# Altium PCB PCB1.PcbDoc
Units mm, origin at the board's own origin, x right, y up, seen from the top; angles counter-clockwise.
Board outline 64.13 x 24.77 mm, 2 copper layers (Top Layer, Bottom Layer); 46 components, 34 nets, 209 pads, 71 vias.
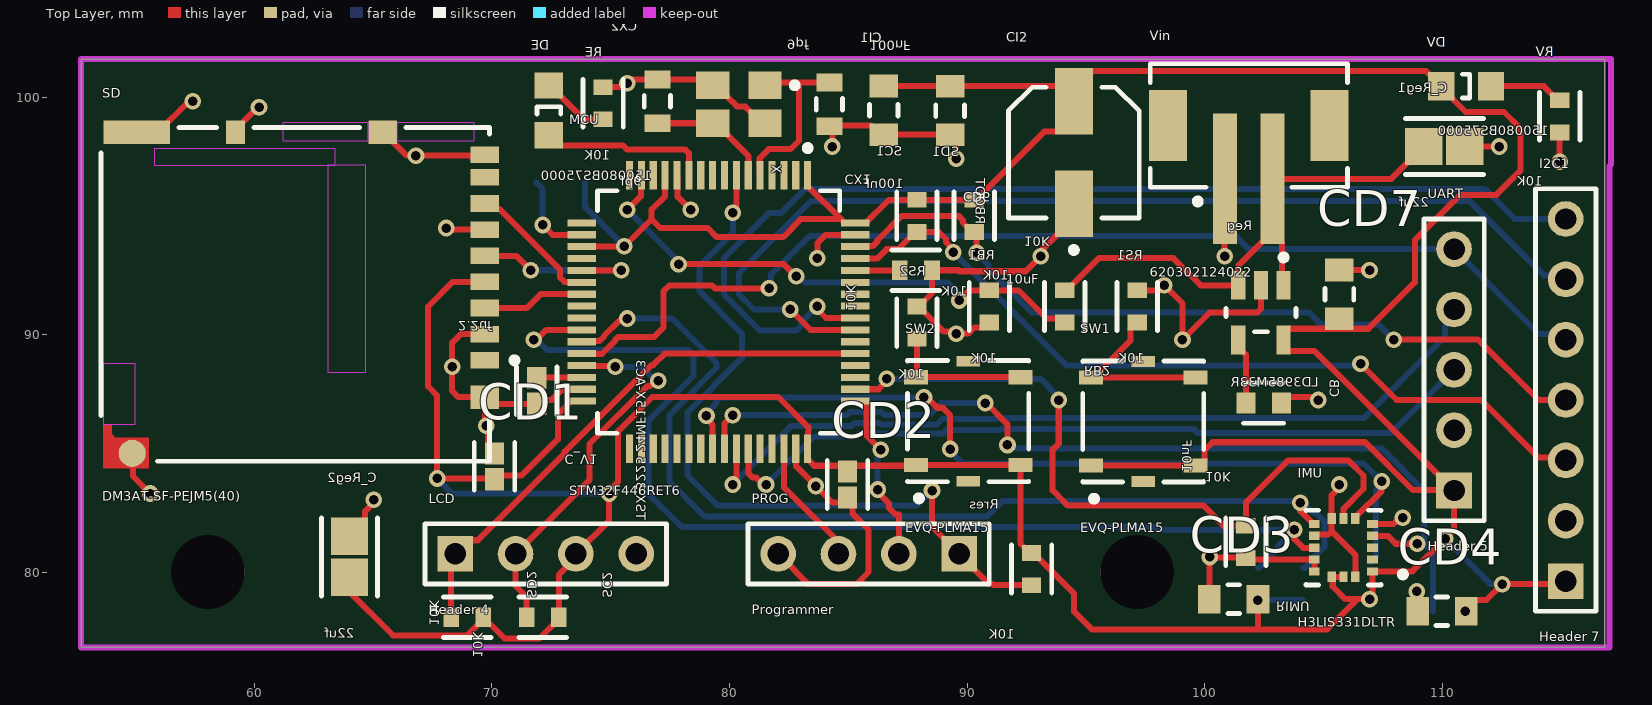
[diagram p0: Top Layer view]
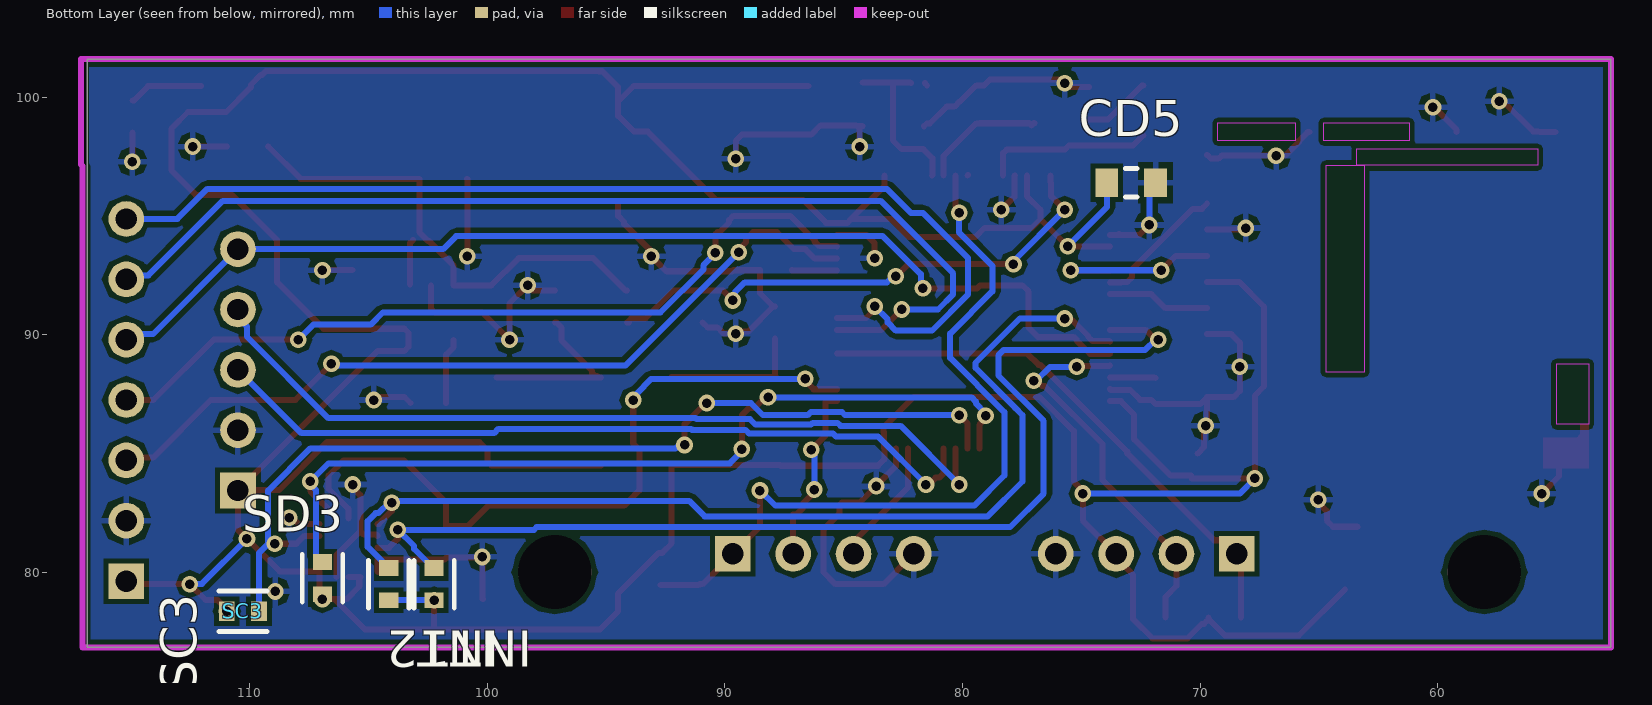
[diagram p1: Bottom Layer view, seen from below]
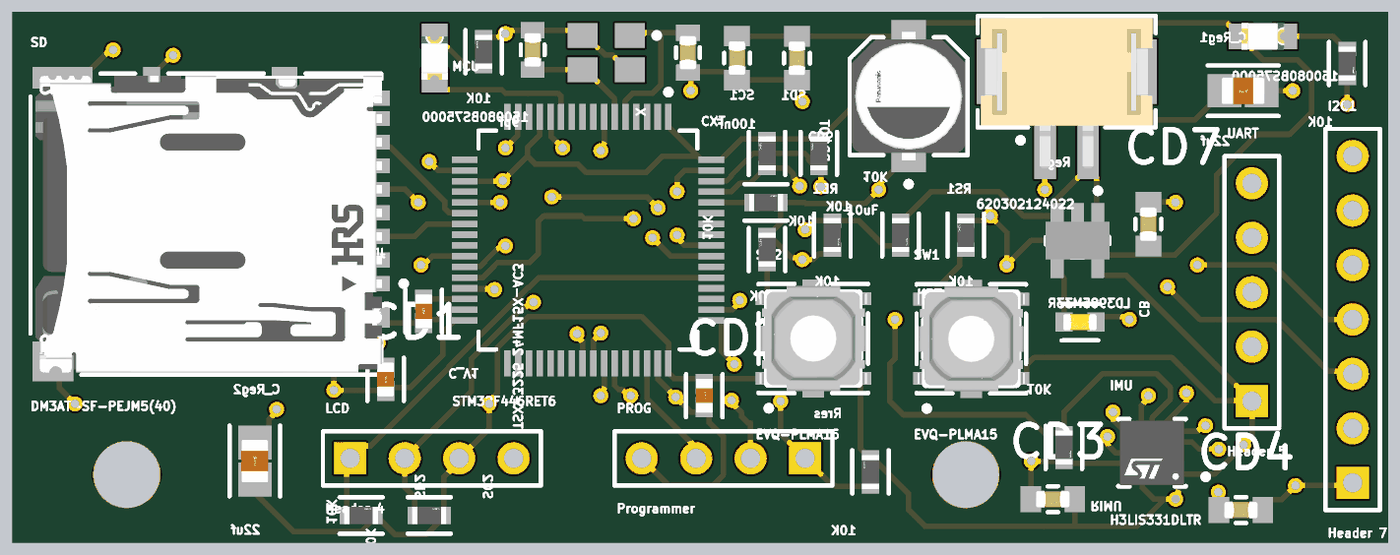
[diagram p2: 3D render of the assembled board from above, using the file's embedded part models]
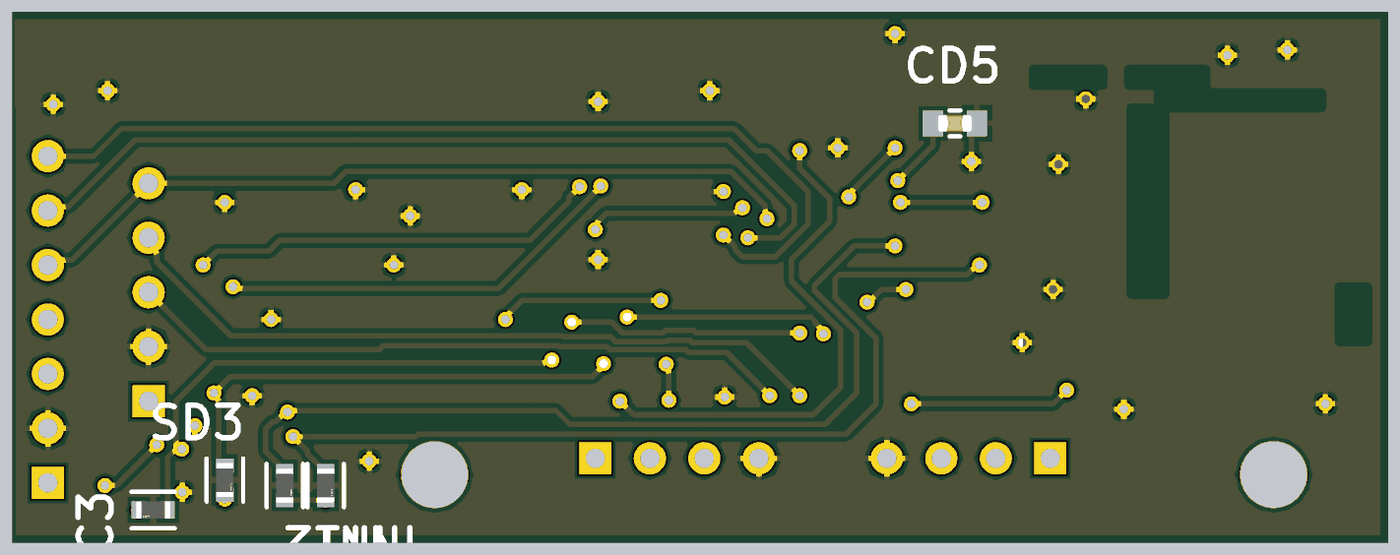
[diagram p3: 3D render of the assembled board from below, using the file's embedded part models]

## Layer stack, top to bottom
Top Solder: solder mask 0.0102, Solder Resist, Dk 3.5
Top Layer: signal copper 0.0356
Dielectric 1: dielectric 0.32, FR-4, Dk 4.8
Bottom Layer: signal copper 0.0356
Bottom Solder: solder mask 0.0102, Solder Resist, Dk 3.5

## Board outline
52.705,76.835 52.705,101.6 116.84,101.6 116.84,76.835

## Design rules (kind name [scope] priority, off if disabled: settings)
Clearance [All] p1: gap=0.2 ignorepadtopadclearanceinfootprint=FALSE except(0.127: Arc-Arc Arc-Track Track-Track SMDPad-SMDPad)
PolygonConnect [All] p1: connectstyle=Relief reliefconductorwidth=0.254 reliefentries=4 polygonreliefangle="90 Angle" airgapwidth=0.254
RoutingVias [All] p1: holewidth=0.711 width=1.27 viastyle="Through Hole" minholewidth=0.711 minwidth=1.27 maxholewidth=0.711 maxwidth=1.27
SolderMaskExpansion [All] p1: expansion=0.102 istentingtop=FALSE
Width [All] p1: maxlimit=0.5 minlimit=0.254 preferedwidth=0.254
30 further rules are at their usual default settings.

## Components (designator, comment, footprint, x,y, rotation, side; value= is the part's Value field where it differs from the comment)
C_Reg1 "22uf" FP-C2012-125-0_2-IPC_A 110.084,97.917 r180 top
C_Reg2 "22uf" FP-C2012-125-0_2-IPC_A 64.008,80.645 r270 top
C_V1 "2.2uf" FP-C1608-080-0_1-IPC_C 71.882,87.63 r270 top
CB "10nF" FP-CC0603-DA-MFG 102.477,87.122 r0 top value="10 nF"
CD1 "4.7uf" FP-C1608-080-0_1-IPC_C 70.104,84.455 r90 top
CD2 "4.7uf" FP-C1608-080-0_1-IPC_C 84.963,83.693 r270 top
CD3 "100nF" FP-CGA3E-0_3-0_1-IPC_A 101.21,78.867 r180 top
CD4 "100nF" FP-CGA3E-0_3-0_1-IPC_A 109.982,78.359 r180 top
CD5 "100nF" FP-CGA3E-0_3-0_1-IPC_A 72.898,96.393 r180 bottom
CD6 "100nF" FP-CGA3E-0_3-0_1-IPC_A 89.281,99.432 r270 top
CD7 "100nF" FP-CGA3E-0_3-0_1-IPC_A 105.664,91.694 r90 top
CI1 "100nF" FP-CGA3E-0_3-0_1-IPC_A 86.487,99.441 r90 top
CI2 "10uF" FP-SC-MFG 94.488,97.663 r90 top
CX1 "9pf" FP-CGA3E-0_3-0_1-IPC_B 84.201,99.695 r270 top
CX2 "9pf" FP-CGA3E-0_3-0_1-IPC_B 76.962,99.822 r90 top
DE "150080BS75000" 0805_A 72.39,99.441 r270 top
DV "150080BS75000" 0805_A 110.998,100.457 r180 top
I2C1 "Header 7" HDR1X7 115.189,79.629 r90 top
IMU "H3LIS331DLTR" FP-TFLGA16-7983231-MFG 105.836,81.034 r180 top
INT1 "10K" FP-RC0603-0_55-IPC_C 102.235,79.502 r270 bottom
INT2 "10K" FP-RC0603-0_55-IPC_C 104.14,79.502 r270 bottom
LCD "Header 4" HDR1X4 68.453,80.772 r0 top
MCU "STM32F446RET6" FP-LQFP64-5W-MFG 79.537,90.952 r270 top
PROG "Programmer" HDR1X4 89.662,80.772 r180 top
RB1 "10K" FP-RC0603-0_55-IPC_C 90.932,91.186 r270 top
RB2 "10K" FP-RC0603-0_55-IPC_C 94.107,91.186 r270 top
RBOOT "10K" FP-RC0603-0_55-IPC_C 87.842,92.71 r0 top
RE "10K" FP-RC0603-0_55-IPC_C 74.676,99.737 r90 top
Reg "LD3985M33R" FP-SOT23-5L-7049676-MFG 102.362,90.925 r270 top
RIMU "10K" FP-RC0603-0_55-IPC_C 101.727,81.28 r270 top
Rres "10K" FP-RC0603-0_55-IPC_C 92.71,80.137 r90 top
RS1 "10K" FP-RC0603-0_55-IPC_C 97.155,91.186 r90 top
RS2 "10K" FP-RC0603-0_55-IPC_C 87.884,90.509 r90 top
RV "10K" FP-RC0603-0_55-IPC_C 114.935,99.187 r270 top
SC1 "10K" FP-RC0603-0_55-IPC_C 87.884,94.996 r90 top
SC2 "10K" FP-RC0603-0_55-IPC_C 72.136,78.105 r0 top
SC3 "10K" FP-RC0603-0_55-IPC_C 110.278,78.359 r0 bottom
SD "DM3AT-SF-PEJM5(40)" FP-DM3AT-SF-PEJM5_40-MFG 61.722,91.694 r270 top
SD1 "10K" FP-RC0603-0_55-IPC_C 90.297,94.996 r90 top
SD2 "10K" FP-RC0603-0_55-IPC_C 68.961,78.105 r0 top
SD3 "10K" FP-RC0603-0_55-IPC_C 106.934,79.756 r270 bottom
SW1 "EVQ-PLMA15" FP-EVQ-PLMA15-MFG 97.409,86.345 r90 top
SW2 "EVQ-PLMA15" FP-EVQ-PLMA15-MFG 90.043,86.36 r90 top
UART "Header 5" HDR1X5 110.49,83.439 r90 top
Vin "620302124022" 620302124022 101.854,98.806 r180 top
X "TSX-3225 24MF15X-AC3" EPSON-TSX-3225_V 80.391,99.695 r180 top

## Footprints (in the part's own frame and the unit in brackets; to place one, negate y for a bottom-side part, rotate by r counter-clockwise, add the part's x,y. Pads: shape width x height; smd on the part's side, far side on the other; paste and mask are expansions set on the pad)
0805_A [mm] "Chip LED, 2-Leads, Body 2.0x1.3mm, IPC Medium Density"
  rect 1.1x1.2 smd: 1(-1.05,0) 2(1.05,0)
  silkscreen extent -0.15,-0.5 0.15,0.5, body extent -1,-0.63 1,0.63, height 0.68
620302124022 [mm] "2.00mm SMT Male Vertical Shrouded Header, 2p"
  rect 1x5.5 smd: 1(1,2.25) 2(-1,2.25)
  rect 1.6x3 smd: MP1(-3.4,0) MP2(3.4,0)
  silkscreen extent -4.15,-2.6 4.15,3.32, body extent -4,-2.5 4,4.51, height 6.77
EPSON-TSX-3225_V [mm] "SMD, 4-Leads, Body 3.2x2.5mm"
  rect 1.4x1.15 smd: 1(-1.1,-0.8) 2(1.1,-0.8) 3(1.1,0.8) 4(-1.1,0.8)
  silkscreen extent -2.48,-0.92 -2.23,-0.68, body extent -1.6,-1.25 1.6,1.25, height 0.6
FP-C1608-080-0_1-IPC_C [mm]
  rect 0.931x0.812 smd paste+0 mask+0: 1(-0.541,0) 2(0.541,0)
  silkscreen extent -1.01,-0.85 1.01,0.85, body extent -0.8,-0.4 0.8,0.4, height 0.9
FP-C2012-125-0_2-IPC_A [mm]
  rect 1.578x1.556 smd paste+0 mask+0: 1(-0.864,0) 2(0.864,0)
  silkscreen extent -1.65,-1.18 1.65,1.18, body extent -1,-0.63 1,0.63, height 1.45
FP-CC0603-DA-MFG [mm]
  rect 0.8x0.9 smd paste+0 mask+0: 1(-0.75,0) 2(0.75,0)
  silkscreen extent -0.85,-0.85 0.85,0.85, body extent -0.8,-0.4 0.8,0.4, height 0.9
FP-CGA3E-0_3-0_1-IPC_A [mm]
  rect 0.956x1.206 smd paste+0 mask+0: 1(-1.025,0) 2(1.025,0)
  silkscreen extent -0.25,-0.6 0.25,0.6, body extent -2,-1.1 2,1.1, height 0.25
FP-CGA3E-0_3-0_1-IPC_B [mm]
  rect 0.756x1.106 smd paste+0 mask+0: 1(-0.925,0) 2(0.925,0)
  silkscreen extent -0.25,-0.55 0.25,0.55, body extent -0.8,-0.4 0.8,0.4, height 1.1
FP-DM3AT-SF-PEJM5_40-MFG [mm]
  rect 0.7x1.2 smd paste+0 mask+0: 1(2.775,7.975) 2(1.675,7.975) 3(0.575,7.975) 4(-0.525,7.975) 5(-1.625,7.975) 6(-2.725,7.975) 7(-3.825,7.975) 8(-4.925,7.975) 9(-5.875,7.975)
  rect 1x0.8 smd paste+0 mask+0: 10(-6.825,-2.525)
  rect 1x1.2 smd paste+0 mask+0: 11(4.325,7.975) 12(-6.825,3.675)
  rect 1x2.8 smd paste+0 mask+0: 13(-6.825,-6.675)
  round 1.145 smd paste+0 mask+0: 14(6.689,-6.861)
  Top Layer region: 6.025,-6.175 7.325,-6.175 7.325,-8.075 5.475,-8.075 5.475,-7.725 5.875,-7.725 6.025,-7.575 6.025,-6.175
  Keep-Out Layer region: -7.225,4.275 -6.475,4.275 -6.475,7.525 -7.225,7.525
  Keep-Out Layer region: -7.225,-0.525 -6.475,-0.525 -6.475,3.075 -7.225,3.075
  Keep-Out Layer region: -6.125,-5.925 -5.425,-5.925 -5.425,1.675 -6.125,1.675
  Keep-Out Layer region: -5.425,1.375 3.275,1.375 3.275,2.975 -5.425,2.975
  Keep-Out Layer region: 2.925,-8.075 5.475,-8.075 5.475,-6.725 2.925,-6.725
  silkscreen extent -7.02,-8.17 7.02,9.35, body extent -6.93,-7.95 6.92,8.2, height 1.68
FP-EVQ-PLMA15-MFG [mm]
  rect 0.45x1 smd paste+0 mask+0: 1(-2.525,0) 2(2.525,0)
  rect 0.6x1 smd paste+0 mask+0: A(-1.85,2.2) A'(-1.85,-2.2) B(1.85,2.2) B'(1.85,-2.2)
  silkscreen extent -3.37,-2.55 2.55,2.55, body extent -2.85,-2.8 2.85,2.8, height 0.25
FP-LQFP64-5W-MFG [mm]
  rect 1.2x0.3 smd paste+0 mask+0: 1(-5.75,3.75) 2(-5.75,3.25) 3(-5.75,2.75) 4(-5.75,2.25) 5(-5.75,1.75) 6(-5.75,1.25) 7(-5.75,0.75) 8(-5.75,0.25) 9(-5.75,-0.25) 10(-5.75,-0.75) 11(-5.75,-1.25) 12(-5.75,-1.75) 13(-5.75,-2.25) 14(-5.75,-2.75) 15(-5.75,-3.25) 16(-5.75,-3.75) 33(5.75,-3.75) 34(5.75,-3.25) 35(5.75,-2.75) 36(5.75,-2.25) 37(5.75,-1.75) 38(5.75,-1.25) 39(5.75,-0.75) 40(5.75,-0.25) 41(5.75,0.25) 42(5.75,0.75) 43(5.75,1.25) 44(5.75,1.75) 45(5.75,2.25) 46(5.75,2.75) 47(5.75,3.25) 48(5.75,3.75)
  rect 0.3x1.2 smd paste+0 mask+0: 17(-3.75,-5.75) 18(-3.25,-5.75) 19(-2.75,-5.75) 20(-2.25,-5.75) 21(-1.75,-5.75) 22(-1.25,-5.75) 23(-0.75,-5.75) 24(-0.25,-5.75) 25(0.25,-5.75) 26(0.75,-5.75) 27(1.25,-5.75) 28(1.75,-5.75) 29(2.25,-5.75) 30(2.75,-5.75) 31(3.25,-5.75) 32(3.75,-5.75) 49(3.75,5.75) 50(3.25,5.75) 51(2.75,5.75) 52(2.25,5.75) 53(1.75,5.75) 54(1.25,5.75) 55(0.75,5.75) 56(0.25,5.75) 57(-0.25,5.75) 58(-0.75,5.75) 59(-1.25,5.75) 60(-1.75,5.75) 61(-2.25,5.75) 62(-2.75,5.75) 63(-3.25,5.75) 64(-3.75,5.75)
  silkscreen extent -7.02,-5.1 5.1,5.1
FP-RC0603-0_55-IPC_C [mm]
  rect 0.659x0.812 smd paste+0 mask+0: 1(-0.677,0) 2(0.677,0)
  silkscreen extent -1.01,-0.85 1.01,0.85, body extent -0.8,-0.4 0.8,0.4, height 0.55
FP-SC-MFG [mm]
  rect 2.8x1.6 smd paste+0 mask+0: 1(-2.15,0) 2(2.15,0)
  silkscreen extent -4.22,-2.75 2.75,2.75, body extent -3.8,-3 3.8,3, height 0.25
FP-SOT23-5L-7049676-MFG [mm]
  rect 1.2x0.6 smd paste+0 mask+0: 1(-1.15,0.95) 2(-1.15,0) 3(-1.15,-0.95) 4(1.15,-0.95) 5(1.15,0.95)
  silkscreen extent -2.45,-1.47 0.8,1.47, body extent -0.87,-1.5 0.88,1.5, height 1.45
FP-TFLGA16-7983231-MFG [mm]
  rect 0.45x0.35 smd paste+0 mask+0: 1(-1.225,1) 2(-1.225,0.5) 3(-1.225,0) 4(-1.225,-0.5) 5(-1.225,-1) 9(1.225,-1) 10(1.225,-0.5) 11(1.225,0) 12(1.225,0.5) 13(1.225,1)
  rect 0.35x0.45 smd paste+0 mask+0: 6(-0.5,-1.225) 7(0,-1.225) 8(0.5,-1.225) 14(0.5,1.225) 15(0,1.225) 16(-0.5,1.225)
  silkscreen extent -2.63,-1.57 1.57,1.57, body extent -1.5,-1.5 1.5,1.5, height 1
HDR1X4 [mm] "Connector; Header; 4 Position"
  rect 1.5x1.5 hole 0.9: 1(0,0)
  round 1.5 hole 0.9: 2(2.54,0) 3(5.08,0) 4(7.62,0)
  silkscreen extent -1.27,-1.27 8.89,1.27
HDR1X5 [mm] "Connector; Header; 5 Position"
  rect 1.5x1.5 hole 0.9: 1(0,0)
  round 1.5 hole 0.9: 2(2.54,0) 3(5.08,0) 4(7.62,0) 5(10.16,0)
  silkscreen extent -1.27,-1.27 11.43,1.27
HDR1X7 [mm] "Connector; Header; 7 Position"
  rect 1.5x1.5 hole 0.9: 1(0,0)
  round 1.5 hole 0.9: 2(2.54,0) 3(5.08,0) 4(7.62,0) 5(10.16,0) 6(12.7,0) 7(15.24,0)
  silkscreen extent -1.27,-1.27 16.51,1.27

## Part data
C_Reg1 C_Reg2: library part CMP-08246-007072-1, "Multilayer Ceramic Capacitors 22μF ±20% 16V X6S SMD 0805", Capacitance=22uF, Case Code (Imperial)=0805, Case Code (Metric)=2012, Dielectric=X6S, Dielectric Material=Ceramic, Max Operating Temperature=105°C, Min Operating Temperature=-55°C, Package Quantity=2000, Tolerance=20%, Voltage Rating=16V, Case/Package=0805, Height=1.25mm, Lead Free="Lead Free", Length=0.079inch, Mount="Surface Mount", Packaging="Tape and Reel", REACH SVHC="No SVHC", RoHS Compliant=Yes, Series=C, Termination=SMD/SMT, Thickness=0.057inch, Voltage Rating (DC)=16V, Weight=0.000194oz, Width=0.049inch
C_V1 CD1 CD2: library part CMP-2000-04981-2, "Multilayer Ceramic Capacitors 4.7μF ±10% 16V X5R SMD 0603", Capacitance=4.7uF, Case Code (Imperial)=0603, Case Code (Metric)=1608, Dielectric=X5R, Dielectric Material=Ceramic, Max Operating Temperature=85°C, Min Operating Temperature=-55°C, Package Quantity=1, Tolerance=10%, Voltage=16V, Case/Package=0603, Construction=Flat, Depth=0.8mm, Height=0.8mm, Lead Free="Lead Free", Length=1.6mm, Mount="Surface Mount", Packaging="Tape and Reel", REACH SVHC="No SVHC", RoHS Compliant=Yes, Series=C, Termination=SMD/SMT, Thickness=0.035inch, Voltage Rating=16V, Voltage Rating (DC)=16V, Weight=7.1E-05oz, Width=0.031inch
CB: library part CMP-2100-03600-2, "CAP CER 10000PF 50V X7R 0603", Capacitance="10 nF", Manufacturer=YAGEO, Manufacturer Part Number=CC0603KRX7R9BB103, Package=CC0603-DA, Temperature="-55°C to +125°C", Temperature Characteristic=X7R, Temperature Coefficient=15%, Temperature Range High=+125°C, Temperature Range Low=-55°C, Tolerance=0.1, Voltage="50 V", Automotive=No, Category=Cap, ComponentLink2Description=Datasheet, ComponentLink2URL=http://www.yageo.com/documents/recent/UPY-GPHC_X7R_6.3V-to-50V_18.pdf, Device Class L1="Passive Components", Device Class L2=Capacitors, Device Class L3="Ceramic Capacitors", Digikey Description="CAP CER 10000PF 50V X7R 0603", Footprint Url=http://www.yageo.com/exep/pages/download/literatures/UPY-C_GEN_24.pdf, Height=0.9mm, Lead Free=Yes, Material=Ceramic, Mouser Description="Multilayer Ceramic Capacitor, CC Series, 0.01 - F, - 10%, X7R, 50 V, 0603 [1608 Metric]", Octopart=https://octopart.com/cc0603krx7r9bb103-yageo-192938, RoHS=TRUE, Voltage Rating="50 V"
CD3 CD4 CD5 CD6 CD7 CI1: library part CMP-2000-07546-2, "Cap Ceramic 100nF 50V X7R 10% Pad SMD 0603 +125°C Automotive T/R", Case Code (Imperial)=0603, Case Code (Metric)=1608, Dielectric=X7R, Max Operating Temperature=125°C, Min Operating Temperature=-55°C, Package Quantity=1, Ratings=AEC-Q200, Tolerance=10%, Voltage=50V, Capacitance=100nF, Case/Package=0603, Composition=Ceramic, Depth=0.8mm, Height=0.8mm, Lead Free="Lead Free", Length=1.6mm, Mount="Surface Mount", Packaging="Tape and Reel", Radiation Hardening=No, REACH SVHC="No SVHC", Termination=SMD/SMT, Thickness=0.035inch, Voltage Rating=50V, Voltage Rating (DC)=50V, Weight=7.1E-05oz, Width=0.8mm
CI2: library part CMP-05427-000087-1, "CAP ALUM 10UF 20% 35V SMD", Case/Package=Radial, Leakage Current=3uA, Max Operating Temperature=85°C, Min Operating Temperature=-40°C, Package Quantity=1, Ripple Current=30mA, Tolerance=20%, Voltage=35V, Capacitance=10uF, Construction=Cylindrical, Contact Plating=Tin, Diameter=5mm, Height=5.4mm, Height - Seated (Max)=0.213inch, Lead Length=2.2mm, Lead Pitch=1.5mm, Length=5.5mm, Life (Hours)=2000Hour, Mount="Surface Mount", Number of Pins=2, Packaging="Tape and Reel", Radiation Hardening=No, REACH SVHC="No SVHC", Ripple Current (AC)=30mA, RoHS Compliant=Yes, Series=S, Termination=SMD/SMT, Voltage Rating=35V, Voltage Rating (DC)=35V, Width=5.3mm
CX1 CX2: library part CMP-08246-000963-1, "Cap Ceramic 9pF 50V C0G 0.5pF Pad SMD 0603 +125°C Automotive T/R", Capacitance=9pF, Case Code (Imperial)=0603, Case Code (Metric)=1608, Dielectric=C0G, Max Operating Temperature=125°C, Min Operating Temperature=-55°C, Package Quantity=4000, Ratings=AEC-Q200, Voltage Rating=50V, Case/Package=0603, Composition=Ceramic, Depth=0.8mm, Height=0.8mm, Length=1.6mm, Mount="Surface Mount", Packaging="Tape and Reel", REACH SVHC="No SVHC", Termination=SMD/SMT, Thickness=0.035inch, Voltage Rating (DC)=50V, Weight=7.1E-05oz, Width=0.031inch
DE DV: library part CMP-1426-00008-1, "SMD mono-color Chip LED, WL-SMCW, Blue", Color=Blue, Manufacturer="Wuerth Elektronik", ComponentLink1Description="Manufacturer URL", ComponentLink1URL=http://www.we-online.com, ComponentLink2Description=Datasheet, ComponentLink2URL=http://katalog.we-online.com/led/datasheet/150080BS75000.pdf, PackageReference=0805_A, PartNumber=150080BS75000
I2C1: "Header, 7-Pin", LatestRevisionDate=17-Jul-2002, LatestRevisionNote="Re-released for DXP Platform.", Publisher="Altium Limited"
IMU: library part CMP-12175-000002-1, "ACCEL 100-400G I2C/SPI 16TFLGA", Manufacturer=STMicroelectronics, Max Supply Voltage=3.6V, Min Supply Voltage=2.16V, Operating Supply Current=10-300uA, Package=TFLGA16-7983231, Temperature="-40°C to +85°C", Temperature Range High=+85°C, Temperature Range Low=-40°C, Accel Axis="X+Y and Z", Accel Range=100/200/400g, Accel Resolution=16bits, Automotive=No, Category=IC, ComponentLink2Description=Datasheet, ComponentLink2URL=https://www.st.com/resource/en/datasheet/h3lis331dl.pdf, Device Class L1=Sensors, Device Class L2="Motion Sensors", Device Class L3=Accelerometers, Digikey Description="ACCEL 100-400G I2C/SPI 16TFLGA", Footprint Url=https://www.st.com/content/ccc/resource/technical/document/technical_note/73/17/9c/16/dd/96/4a/01/CD00134799.pdf/files/CD00134799.pdf/jcr:content/translations/en.CD00134799.pdf, Height=1mm, Lead Free=Yes, Manufacturer Part Number=H3LIS331DLTR, Mouser Description="Accelerometer Triple +/-100g/+/-200g/+/-400g 2.5V 16-Pin TFLGA T/R", Octopart=https://octopart.com/h3lis331dltr-stmicroelectronics-29186499, RoHS=TRUE, Sensor Output=I2C,SPI
INT1 INT2 RB1 RB2 RBOOT RE RIMU Rres RS1 RS2 RV SC1 SC2 SC3 SD1 SD2 SD3: library part CMP-2100-03664-2, "RES 10K OHM 1% 1/10W 0603", Case Code (Imperial)=0603, Case Code (Metric)=1608, Max Operating Temperature=155°C, Max Power Dissipation=100mW, Min Operating Temperature=-55°C, Resistance=10kR, Resistance Tolerance=1%, Resistor Type="Thick Film", Temperature Coefficient=100ppm/°C, Voltage Rating=75V, Voltage Rating (DC)=50V, Case/Package=0603, Construction=Rectangular, Depth=0.8mm, Features="Moisture Resistant", Height=0.45mm, Lead Free="Lead Free", Lead Pitch=0.3mm, Length=1.6mm, Military Standard=Not, Number of Pins=2, Number of Terminations=2, Packaging="Tape and Reel", Power Rating=100mW, RoHS Compliant=Yes, Series=RC, Size Code=0603, Termination=SMD/SMT, Tolerance=1%, Weight=7.1E-05oz, Width=0.8mm
LCD: "Header, 4-Pin", LatestRevisionDate=17-Jul-2002, LatestRevisionNote="Re-released for DXP Platform.", Publisher="Altium Limited"
MCU: library part CMP-12105-000007-1, "IC MCU 32BIT 512KB FLASH 64LQFP", Ambient Temperature Range High=+85°C, Ambient Temperature Range Low=-40°C, Frequency=180MHz, Manufacturer=ST, Max Junction Temp=+105°C, Max Supply Voltage=3.6V, Min Supply Voltage=1.7V, Package=LQFP64-5W, Temperature="-40°C to +105°C", Automotive=No, Category=IC, ComponentLink2Description=Datasheet, ComponentLink2URL=https://www.st.com/en/microcontrollers-microprocessors/stm32f446re.html, Core Architecture="ARM Cortex-M4", Data Bus Width=32bits, Device Class L1="Integrated Circuits (ICs)", Device Class L2="Embedded Processors and Controllers", Device Class L3=Microcontrollers, Digikey Description="IC MCU 32BIT 512KB FLASH 64LQFP", Height=1.6mm, Interface=I2C,SPI,UART,USART,CAN,USB,LIN,IrDA,I2S,Other, Ipc Land Pattern Name=QFP50P1200X1200X160-64, Lead Free=Yes, Manufacturer Part Number=STM32F446RET6, Memory Size=512KBytes, Memory Type=FLASH, Mouser Description="ARM Microcontrollers - MCU High-performance and DSP with FP, ARM Cortex-M4 MCU with 512 Kbytes Flash, 180 MHz CPU, Art Accelerator, SDRAM", Number Of A/D Converters=3, Number Of Adc Channels=16, Number Of Cores=1, Number Of I2C Channels=4, Number Of I/Os=50, Number Of Pwm Channels=32, Number Of Spi Channels=4, Number Of Timers/Counters=14, Number Of Uart Channels=6, Number Of Usb Channels=2, Octopart=https://octopart.com/stm32f446ret6-stmicroelectronics-52642920, Ram Size=128KBytes, RoHS=TRUE, Standoff Height=0.05mm, Temperature Range High=+105°C, Temperature Range Low=-40°C
PROG: library part "Header 4", "Header, 4-Pin", LatestRevisionDate=17-Jul-2002, LatestRevisionNote="Re-released for DXP Platform.", Publisher="Altium Limited"
Reg: library part CMP-0244-00328-2, "IC REG LINEAR 3.3V 150MA SOT23-5", Case/Package=SOT-23, Dropout Voltage=60mV, Input Bias Current=85uA, Max Input Voltage=6V, Max Operating Temperature=125°C, Max Output Current=150mA, Min Current Limit=300mA, Min Input Voltage=2.5V, Min Operating Temperature=-40°C, Min Output Voltage=3.3V, Output Voltage Accuracy=2%, Package Quantity=1, Quiescent Current=150uA, Accuracy=2%, Height=1.3mm, Lead Free="Lead Free", Length=3mm, Mount="Surface Mount", Number Of Outputs=1, Number of Pins=5, Number of Regulators=1, Output Current=150mA, Output Type=Fixed, Output Voltage=3.3V, Packaging="Tape and Reel", Polarity=Positive, Radiation Hardening=No, Width=1.75mm
SD: library part CMP-11597-000006-1, "CONN MICRO SD R/A PUSH-PUSH SMD", Color=Black, Contact Resistance=100mR, Current Rating=500mA, Flammability Rating="UL94 V-0", Insulation Resistance=1GR, Max Operating Temperature=85°C, Max Voltage Rating (AC)=125V, Min Operating Temperature=-25°C, Package Quantity=400, Connector Type=Connector, Contact Material="Copper Alloy", Contact Plating=Gold, Depth=15.95mm, Gender=Receptacle, Housing Material=Polymer, Lead Free="Lead Free", Length=13.85mm, Mating Cycles=10000, Max Current Rating=500mA, Mount="Surface Mount", Number of Contacts=8, Number of Rows=2, Orientation="Right Angle", Packaging="Tape and Reel", Pitch=1.1mm, Radiation Hardening=No, REACH SVHC="No SVHC", Series=DM3, Termination=Solder, Voltage Rating=125V, Voltage Rating (AC)=125V, Width=13.85mm
SW1 SW2: library part CMP-05618-000006-1, "SWITCH TACTILE SPST-NO 0.02A 15V", Contact Current Rating=20mA, Contact Resistance=50mΩ, Manufacturer="Panasonic Electronic Components", Operating Force=2.6N, Package=0, Temperature="-20°C to +70°C", Temperature Range High=+70°C, Temperature Range Low=-20°C, Voltage Rating Dc=15V, Automotive=No, Category=Switch, ComponentLink2Description=Datasheet, ComponentLink2URL=https://datasheet.ciiva.com/8164/atv0000ce2-8164994.pdf, Device Class L1=Electromechanical, Device Class L2=Switches, Device Class L3="Tactile Switches", Digikey Description="SWITCH TACTILE SPST-NO 0.02A 15V", Electromechanical Life=200000Cycles, Height=1.7mm, Lead Free=Yes, Manufacturer Part Number=EVQ-PLMA15, Mount="Surface Mount", Mouser Description="Tactile Switches FLAT ACT 2.6NF 4.6x3.4x1.5mm", Octopart=https://octopart.com/evq-plma15-panasonic-39850235, RoHS=TRUE, Throw Configuration=SPST-NO
UART: "Header, 5-Pin", LatestRevisionDate=17-Jul-2002, LatestRevisionNote="Re-released for DXP Platform.", Publisher="Altium Limited"
Vin: library part CMP-1502-00660-1, "Male Shrouded Header WR-WTB, SMT, Vertical, pitch 2 mm, 1 x 2 position", Contact Resistance=20mOhm, Manufacturer="Wurth Elektronik", Operating Temperature=-25to85degC, Working Voltage=100VAC, Datasheet URL=https://katalog.we-online.de/em/datasheet/6203xx124022.pdf, Gender=Male, Manufacturer URL=http://www.we-online.de, Mounting Technology=SMT, Orientation=Vertical, Package Reference=620302124022, Packaging=TapeandReel, Part Number=620302124022, Pitch=2mm, Position=1x2, Publisher=WurthElektronik
X: library part CMP-2000-07333-1, "MHz Range Crystal, 24 MHz, -40 to 85 degC, 4-Pin SMD, RoHS, Tape and Reel", Frequency=24MHz, Frequency Stability=10PPM, Load Capacitance=9pF, Manufacturer=Epson, Operating Temperature Range=-40Cto+85C, Package / Case=3.2mmx2.5mm, Package Description="4-Pin Surface Mount Device, Body 3.2 x 2.5 mm", Package Reference=TSX-3225, Brand=EpsonTiming, Datasheet URL=https://support.epson.biz/td/api/doc_check.php?dl=brief_FA-238V_en.pdf, Datasheet Version=12/2015, Drive Level=200uW, ESR=40Ohms, Factory Pack Quantity=250, Height=0.6mm, Length=3.2mm, Manufacturer URL=https://www.eea.epson.com/, Mounting Style=SMD/SMT, Mounting Technology=SurfaceMount, Packaging=Reel, Product Category=Crystals, RoHS=True, Series=TSX-3225, Termination Style=SMD/SMT, Tolerance=10PPM, Type=Crystal, Unit Weight=0.000564oz, Width=2.5mm

## Free pads (board coordinates)
  oval 3.1x1.524 hole 3.1: 1(58.039,80.01) 1(97.155,80.01)

## Via types
v1: diameter 0.7, hole 0.4, Top Layer to Bottom Layer, 71 vias

## Nets (pads, with @x,y where several pads share a name; then routed paths per layer and width w, separated by ;. In a path a pad name is that pad's centre, name@x,y a point inside that pad or via, vN(x,y) a via of type N, cw(c..) or ccw(c..) an arc to the next point about the centre after c; other vN are vias at no path point)
+3V3: C_Reg2.2 CD1.1 CD2.1 CD3.1 CD4.1 CD5.1 CD6.1 CD7.1 CI1.2 CI2.2 DV.2 I2C1.1 IMU.1 IMU.14 IMU.15 INT1.2 INT2.2 LCD.3 MCU.1 MCU.13 MCU.19 MCU.32 MCU.48 MCU.64 Reg.5 Rres.2 SC1.2 SC2.2 SC3.2 SD1.2 SD2.2 SD3.2 SD.4 SW1.A SW1.A' SW2.A SW2.A' UART.1 | length 209.5
  Top Layer w0.254: C_Reg2.2@63.897,79.271 63.908,79.271 65.836,77.343 68.952,77.343 69.638,78.028 SD2.2 ; SD.4 68.343,92.219 67.31,91.186 67.31,87.817 67.691,87.436 v1(67.691,83.947) 70.358,83.947 70.358,84.051 70.383,84.076 71.249,84.076 72.771,85.598 72.771,86.636 73.337,87.202 MCU.32 ; SD2.2@69.739,77.927 69.84,77.826 69.917,77.826 70.527,77.216 72,77.216 72.813,78.028 SC2.2 72.813,79.893 73.533,80.613 LCD.3 74.93,82.169 74.93,83.433 75.31,83.813 75.31,85.937 76.749,87.376 82.042,87.376 83.312,86.106 83.312,85.896 83.31,85.894 83.31,85.225 MCU.48 83.287,84.752 83.557,84.483 87.658,84.483 87.685,84.51 SW2.A' ; MCU.19 75.555,93.702 76.715,94.862 ; MCU.13 77.287,95.829 76.715,95.257 76.715,94.862 ; MCU.1 83.287,96.252 84.67,94.869 ; CI1.2 89.272,100.466 CD6.1 93.844,100.457 CI2.2 ; SW2.A'@92.243,84.502 92.243,81.204 92.633,80.814 Rres.2 92.787,80.814 94.488,79.112 94.488,78.359 95.25,77.597 102.235,77.597 ; SW1.A SW1.A' ; SW1.A'@99.624,84.495 99.809,84.495 99.982,84.668 99.982,85.123 100.33,85.471 106.748,85.471 108.762,83.457 110.472,83.457 104.619,89.31 103.485,89.31 103.312,89.483 Reg.5 103.312,90.075 103.485,90.248 106.885,90.248 108.839,92.202 108.839,93.98 110.744,95.885 112.268,95.885 113.284,96.901 113.284,98.679 112.592,99.371 110.984,99.371 109.948,100.407 109.948,100.507 109.525,100.93 109.475,100.93 109.313,101.092 95.31,101.092 95.304,101.086 95.161,101.086 94.488,100.413 CI2.2 ; CD3.1 102.235,77.597 ; IMU.15 IMU.14 105.384,79.761 105.384,79.401 105.918,78.867 106.415,78.867 ; UART.1 110.49,81.788 v1(110.109,81.407) 108.736,80.034 IMU.1 107.061,79.016 106.912,78.867 106.415,78.867 ; CD4.1 111.007,78.484 111.358,78.835 111.855,78.835 v1(112.522,79.502) 115.062,79.502 I2C1.1 ; 76.715,94.862 77.089,94.488 79.08,94.488 79.461,94.107 82.251,94.107 83.013,94.869 84.67,94.869 ; 84.67,94.869 84.837,94.702 MCU.64 85.737,94.702 86.708,95.673 SC1.2 SD1.2 90.374,95.673 93.241,98.54 93.815,98.54 94.488,99.213 CI2.2 ; 102.235,77.597 105.145,77.597 106.415,78.867
  Bottom Layer w0.254: v1(67.691,83.947) 68.326,83.312 v1(74.93,83.312) ; CD5.1 73.923,95.368 v1(75.565,93.726) ; v1(102.235,78.825) INT2.2 ; v1(110.109,81.407) 112.005,79.511 112.513,79.511 v1(112.522,79.502)
  other v1: 110.954,78.359 106.934,78.867
ADC0: MCU.15 RB1.1 RB2.2 | length 22.7
  Top Layer w0.254: v1(75.692,95.25) 76.264,95.822 76.264,96.393 76.287,96.416 MCU.15 ; v1(77.851,92.964) 82.278,92.964 82.786,92.456 v1(82.804,92.456) ; v1(89.662,91.44) 90.085,91.863 RB1.1 92.16,91.863 93.345,90.678 93.938,90.678 RB2.2 RB2.2@94.03,90.509
  Bottom Layer w0.254: v1(75.692,95.25) v1@77.915,93.027 ; v1(82.804,92.456) 82.922,92.456 83.176,92.202 89.154,92.202 89.577,91.779 89.577,91.525 v1(89.662,91.44)
GND: C_Reg1.1 C_Reg2.1 C_V1.2 CB.2 CD1.2 CD2.2 CD3.2 CD4.2 CD5.2 CD6.2 CD7.2 CI1.1 CI2.1 CX1.2 CX2.2 I2C1.2 IMU.5 IMU.8 IMU.10 IMU.12 IMU.13 IMU.16 LCD.4 MCU.12 MCU.18 MCU.31 MCU.47 MCU.63 PROG.4 RB1.2 RBOOT.2 RE.2 Reg.2 RIMU.2 RS1.2 RS2.2 RV.2 SD.2 SD.6 SD.9 SD.10 SD.11 SD.12 SD.13 SD.14 UART.2 Vin.1 X.2 X.4 | length 106.4
  Top Layer w0.254: SD.14 54.886,84.98 54.886,84.052 v1(55.626,83.312) ; SD.13 55.72,98.519 55.753,98.552 55.98,98.552 57.25,99.822 v1(57.404,99.822) ; SD.10 59.197,98.619 60.146,99.568 v1(60.198,99.568) ; C_Reg2.1@63.373,81.915 64.403,81.915 64.659,82.171 64.659,82.572 65.024,82.937 v1(65.024,83.058) ; SD.12 65.472,98.519 65.845,98.146 65.845,98.106 66.414,97.536 v1(66.802,97.536) 69.088,97.536 69.215,97.409 69.537,97.409 SD.9 ; v1(68.072,94.488) 68.141,94.419 SD.6 ; SD.2 68.683,90.019 68.326,89.662 v1(68.326,88.646) 68.326,87.63 68.587,87.369 SD.11 ; CD1.2 69.825,85.275 69.825,86.101 69.697,86.229 SD.11 ; v1(72.136,94.615) 72.549,94.202 73.383,94.202 73.406,94.225 73.429,94.202 MCU.18 ; MCU.31 73.764,87.679 72.947,87.679 72.52,87.252 72.045,87.252 C_V1.2 69.976,87.089 SD.11 ; RE.2 75.521,100.413 v1(75.688,100.58) 75.855,100.747 CX2.2 78.831,100.747 79.083,100.495 X.2 79.416,100.495 80.114,99.797 80.126,99.797 80.33,99.593 80.668,99.593 81.366,98.895 X.4 X.4@81.616,98.77 ; MCU.12 77.81,96.679 77.81,95.799 v1(78.359,95.25) ; PROG.4@81.804,80.196 82.252,80.645 82.296,80.645 82.169,80.772 PROG.4 82.211,80.603 83.312,79.502 85.344,79.502 85.852,80.01 85.852,81.788 85.176,82.464 85.176,82.814 85.059,82.931 84.709,82.931 84.706,82.934 84.325,82.934 82.804,84.455 82.804,85.185 MCU.47 ; v1(83.693,93.218) 83.693,93.851 84.044,94.202 MCU.63 ; CX1.2 CX1.2@84.31,98.77 ; v1(84.328,97.917) 84.328,98.752 CX1.2@84.31,98.77 ; RS2.2 RS2.2@87.961,91.186 ; v1(89.535,97.409) 89.535,98.153 CD6.2 89.272,98.416 CI1.1 86.362,98.416 85.972,98.806 84.455,98.806 84.419,98.77 CX1.2@84.31,98.77 ; RB1.2 90.73,90.307 90.307,90.307 90.043,90.043 v1(89.535,90.043) 89.45,90.128 89.018,90.128 RS2.2@87.961,91.186 ; v1(93.091,93.303) 92.456,92.668 89.672,92.668 89.629,92.71 RBOOT.2 88.519,91.744 RS2.2@87.961,91.186 ; v1@93.176,93.601 94.234,94.659 94.234,94.742 94.488,94.996 CI2.1 ; RS1.2 98.086,91.863 v1(98.298,92.075) 99.06,91.313 v1(99.06,89.789) 100.203,90.932 102.213,90.932 102.362,91.081 Reg.2 ; CD3.2 100.203,78.885 v1(100.203,80.645) 100.224,80.624 101.706,80.624 101.796,80.534 IMU.12 IMU.13 IMU.13@104.587,80.01 ; v1(100.838,93.303) 100.838,96.54 Vin.1 ; CB.2 103.481,87.376 104.648,87.376 v1(104.775,87.249) ; IMU.10 104.659,81.582 105.187,81.582 105.336,81.731 ; v1(105.664,83.693) 105.664,83.572 105.336,83.244 IMU.8 105.336,81.731 ; CD7.2 106.925,92.719 v1(106.934,92.71) ; IMU.16 106.336,80.731 105.336,81.731 ; IMU.5 107.948,82.034 108.21,82.296 v1(108.331,82.296) ; C_Reg1.1 v1(112.395,97.917) ; v1(114.935,97.282) RV.2
  Bottom Layer w0.254: CD5.2 72.136,96.13 v1(72.136,94.615)
  other v1: 108.924,79.191 83.629,83.629 69.761,86.165
INDICATOR: DE.2 MCU.11 | length 7.1
  Top Layer w0.254: DE.2 72.813,97.968 75.514,97.968 75.692,97.79 78.138,97.79 78.287,97.641 MCU.11
"INT 1": IMU.11 INT1.1 MCU.26 | length 47.3
  Top Layer w0.254: v1(71.755,89.789) 71.876,89.789 72.289,90.202 MCU.26 ; v1(103.759,81.788) 103.759,81.407 104.14,81.026 104.603,81.026 IMU.11
  Bottom Layer w0.254: v1(71.755,89.789) 71.876,89.789 72.32,89.344 78.274,89.344 78.486,89.132 78.486,88.279 76.581,86.374 76.581,83.312 77.997,81.896 97.923,81.896 98.031,81.788 v1(103.759,81.788) 103.081,81.11 103.081,80.983 102.489,80.391 102.489,80.381 102.287,80.179 INT1.1
"INT 2": IMU.9 INT2.1 MCU.27 | length 45
  Top Layer w0.254: MCU.27 73.81,89.725 74.522,89.725 74.714,89.917 74.714,89.949 75.358,90.593 75.607,90.593 v1(75.692,90.678) ; v1(104.013,82.931) 104.013,82.582 104.561,82.034 IMU.9
  Bottom Layer w0.254: v1(75.692,90.678) 77.583,90.678 79.45,88.811 79.45,88.601 77.778,86.929 77.778,86.922 77.47,86.614 77.47,83.82 78.94,82.35 90.846,82.35 91.5,83.004 103.94,83.004 v1(104.013,82.931) 104.134,82.931 104.578,82.486 104.69,82.486 105.029,82.147 105.029,81.068 104.419,80.458 104.419,80.381 104.217,80.179 INT2.1
"INT 3": I2C1.5 MCU.28 UART.5 | length 46.6
  Top Layer w0.254: MCU.28 73.802,89.187 74.627,89.187 75.168,89.729 75.168,89.761 75.317,89.909 76.828,89.909 77.216,90.297 77.216,91.821 77.47,92.075 79.254,92.075 79.381,91.948 v1(81.661,91.948)
  Bottom Layer w0.254: v1(81.661,91.948) 81.746,92.033 81.746,92.541 83.354,94.149 101.304,94.149 101.854,93.599 UART.5 114.062,90.027 114.951,90.027 I2C1.5
"INT 4": I2C1.6 MCU.55 | length 43.8
  Top Layer w0.254: v1(82.55,91.059) 83.407,90.202 MCU.55
  Bottom Layer w0.254: v1(82.55,91.059) 81.026,91.059 80.391,91.694 80.391,92.583 83.439,95.631 111.125,95.631 114.262,92.494 115.024,92.494 I2C1.6
"INT 5": I2C1.7 MCU.56 | length 45.6
  Top Layer w0.254: v1(83.693,91.186) 83.693,91.065 84.056,90.702 MCU.56
  Bottom Layer w0.254: v1(83.693,91.186) 83.15,90.643 83.15,90.516 82.804,90.17 81.28,90.17 79.756,91.694 79.756,93.218 81.661,95.123 82.169,95.123 83.185,96.139 111.774,96.139 113.044,94.869 I2C1.7
M_boot: MCU.60 RBOOT.1 | length 1.9
  Top Layer w0.254: MCU.60 87.158,92.702 RBOOT.1
M_C_V: C_V1.1 MCU.30 | length 1.9
  Top Layer w0.254: C_V1.1 71.913,88.202 MCU.30
M_X1: CX1.1 MCU.5 X.1 | length 7.3
  Top Layer w0.254: MCU.5 81.264,96.725 81.264,97.425 81.644,97.805 82.565,97.805 82.931,98.171 82.931,100.62 ; X.1 X.1@81.58,100.584 ; X.1@82.169,100.584 82.205,100.62 82.931,100.62 ; CX1.1 82.931,100.62
M_X2: CX2.1 MCU.6 X.3 | length 5.3
  Top Layer w0.254: CX2.1 76.998,98.897 77.089,98.806 77.18,98.897 79.289,98.897 X.3 79.416,98.895 80.787,97.524 MCU.6
MISO: MCU.22 SD.7 | length 5.7
  Top Layer w0.254: SD.7 69.92,95.296 70.312,95.296 72.86,92.748 72.86,92.417 73.052,92.225 73.314,92.225 73.337,92.202 MCU.22
MOSI: MCU.23 SD.3 | length 4.3
  Top Layer w0.254: SD.3 71.462,91.119 72.045,91.702 MCU.23
NetCB_1: CB.1 Reg.4 | length 2.8
  Top Layer w0.254: Reg.4 101.412,89.475 101.727,89.16 CB.1
NetDE_1: DE.1 RE.1 | length 2.9
  Top Layer w0.254: DE.1 72.44,100.491 73.871,99.06 RE.1
NetDV_1: DV.1 RV.1 | length 3.1
  Top Layer w0.254: DV.1 114.265,100.457 114.858,99.864 RV.1
NRST: MCU.7 PROG.1 Rres.1 | length 32.8
  Top Layer w0.254: v1(80.137,95.123) 80.137,95.244 80.287,95.394 MCU.7 ; v1(88.519,83.439) 88.519,81.915 PROG.1 90.932,79.502 91.059,79.502 91.101,79.46 Rres.1
  Bottom Layer w0.254: v1(80.137,95.123) 80.137,94.293 78.74,92.896 78.74,91.821 80.518,90.043 80.518,89.027 78.232,86.741 78.232,84.074 79.502,82.804 87.866,82.804 88.501,83.439 v1(88.519,83.439)
RX: MCU.43 UART.3 | length 33.1
  Top Layer w0.254: MCU.43 80.787,84.159 80.967,83.98 81.127,83.98 81.413,83.693 v1(81.534,83.693)
  Bottom Layer w0.254: v1(81.534,83.693) 83.547,85.706 85.314,85.706 85.445,85.837 88.973,85.837 89.128,85.991 91.37,85.991 91.414,86.035 99.527,86.035 99.71,85.852 107.823,85.852 UART.3
S1: RS1.1 SW1.B SW1.B' | length 7.6
  Top Layer w0.254: SW1.B SW1.B@95.307,88.195 ; RS1.1 97.078,90.509 96.876,90.307 96.876,89.764 95.582,88.47 95.582,88.368 95.479,88.265 95.377,88.265 SW1.B@95.307,88.195 ; SW1.B' SW1.B@95.307,88.195
S2: RS2.1 SW2.B SW2.B' | length 6
  Top Layer w0.254: RS2.1 87.884,88.251 SW2.B SW2.B'
SA_IMU: IMU.7 MCU.50 RIMU.1 | length 31
  Top Layer w0.254: MCU.50 86.259,87.702 86.614,88.057 v1(86.614,88.138) ; v1(93.853,87.249) 93.853,85.414 93.599,85.16 93.599,83.445 94.044,83.001 94.044,82.994 94.234,82.804 99.949,82.804 100.796,81.957 RIMU.1 101.727,82.931 103.505,84.709 106.045,84.709 106.68,84.074 106.68,83.513 105.846,82.68 105.846,82.269 IMU.7
  Bottom Layer w0.254: v1(86.614,88.138) 93.097,88.138 93.408,87.827 93.408,87.814 93.853,87.37 v1(93.853,87.249)
SCK: MCU.21 SD.5 | length 7.6
  Top Layer w0.254: SD.5 71.019,93.319 v1(71.628,92.71) ; MCU.21 73.791,92.706 75.434,92.706 v1(75.438,92.71)
  Bottom Layer w0.254: v1(71.628,92.71) v1(75.438,92.71)
SCL1: I2C1.3 MCU.61 SC1.1 | length 34.6
  Top Layer w0.254: MCU.61 86.217,93.202 86.614,93.599 87.087,93.599 87.807,94.319 SC1.1 88.815,94.319 89.108,94.026 89.108,93.893 89.408,93.593 v1(89.408,93.472) ; v1(106.553,88.773) 108.077,87.249 111.633,87.249 114.058,84.824 115.074,84.824 I2C1.3
  Bottom Layer w0.254: v1(89.408,93.472) 94.186,88.694 106.474,88.694 v1(106.553,88.773)
SCL2: LCD.2 MCU.29 SC2.1 | length 16.3
  Top Layer w0.254: SC2.1 71.459,78.956 70.993,79.422 LCD.2 74.097,83.876 74.097,85.4 76.527,87.83 76.653,87.83 76.876,88.053 v1(76.996,88.053) ; MCU.29 73.81,88.679 75.151,88.679 v1(75.184,88.646)
  Bottom Layer w0.254: v1(75.184,88.646) 76.309,88.646 76.902,88.053 v1(76.996,88.053)
SCL3: IMU.4 MCU.41 SC3.1 | length 40.5
  Top Layer w0.254: MCU.41 79.787,86.264 v1(80.137,86.614) ; v1(90.763,87.122) 90.805,87.122 91.694,86.233 v1(91.694,85.358) ; IMU.4 107.696,81.534 108.031,81.199 v1(108.944,81.199)
  Bottom Layer w0.254: v1(80.137,86.614) 84.938,86.614 85.068,86.745 86.382,86.745 86.512,86.614 88.392,86.614 88.9,87.122 v1(90.763,87.122) ; v1(91.694,85.358) 91.779,85.272 92.01,85.272 92.066,85.217 107.442,85.217 109.22,83.439 v1@109.22,81.199 ; v1(108.944,81.199) v1@109.22,81.199 ; SC3.1 109.601,80.818 v1@109.22,81.199
SDA1: I2C1.4 MCU.62 SD1.1 | length 34.3
  Top Layer w0.254: MCU.62 85.31,93.725 86.022,93.725 86.214,93.917 86.214,93.961 87.249,94.996 89.64,94.996 89.82,94.816 89.82,94.72 90.22,94.319 SD1.1 90.396,94.22 v1(90.396,93.442) ; v1(107.95,89.789) 111.506,89.789 114.046,87.249 I2C1.4
  Bottom Layer w0.254: v1(90.396,93.442) 90.396,93.426 90.905,92.917 90.905,92.737 92.71,90.932 104.394,90.932 104.902,90.424 107.315,90.424 v1(107.95,89.789)
SDA2: LCD.1 MCU.53 SD2.1 | length 23.2
  Top Layer w0.254: SD2.1 68.284,80.306 68.199,80.391 68.453,80.645 LCD.1 69.028,81.347 69.409,81.347 73.062,85 73.062,85.077 76.716,88.73 76.792,88.73 77.264,89.202 MCU.53
SDA3: IMU.6 MCU.40 SD3.1 | length 38.4
  Top Layer w0.254: v1(79.028,86.58) 79.028,86.459 79.287,86.2 MCU.40 ; v1(88.181,87.36) 88.301,87.36 88.738,86.923 88.972,86.923 89.281,86.614 v1(89.281,85.187) ; IMU.6 106.336,82.309 107.442,83.415 v1(107.442,83.82)
  Bottom Layer w0.254: v1(79.028,86.58) 79.028,86.7 79.433,87.106 79.433,87.18 79.613,87.36 v1(88.181,87.36) ; v1(89.281,85.187) 89.281,85.09 89.789,84.582 106.68,84.582 v1(107.442,83.82) 107.442,83.699 107.213,83.47 107.213,80.635 107.011,80.433 SD3.1
SWCLK: MCU.49 PROG.2 | length 7.6
  Top Layer w0.254: MCU.49 85.737,87.202 85.76,87.179 85.76,85.76 v1(86.36,85.16) ; v1(86.233,83.481) 86.233,83.365 86.7,82.898 86.7,82.718 86.995,82.423 87.122,82.423 PROG.2
  Bottom Layer w0.254: v1(86.233,83.481) 86.233,84.912 86.36,85.039 v1(86.36,85.16)
SWDIO: MCU.46 PROG.3 | length 5.2
  Top Layer w0.254: MCU.46 82.287,83.575 PROG.3@84.814,81.048
TX: MCU.42 UART.4 | length 35.5
  Top Layer w0.254: v1(80.137,83.693) 80.137,83.814 80.287,83.964 MCU.42
  Bottom Layer w0.254: v1(80.137,83.693) 82.604,86.16 85.126,86.16 85.257,86.291 86.297,86.291 86.37,86.218 88.712,86.218 88.94,86.445 91.182,86.445 91.226,86.489 106.682,86.489 110.109,89.916 110.109,90.341 110.49,90.722 UART.4
Vin: C_Reg1.2 RB2.1 Reg.1 Reg.3 Vin.2 | length 22.3
  Top Layer w0.254: RB2.1 94.184,91.863 95.539,93.218 98.679,93.218 99.822,92.075 Reg.3 101.416,92.079 101.416,92.907 102.442,93.933 102.481,93.933 102.854,94.306 Vin.2 107.848,96.556 109.209,97.917 C_Reg1.2 ; Vin.2@103.124,93.98 103.251,93.853 Reg.1@103.251,92.119
pads on no net: IMU.2 IMU.3 MCU.2 MCU.3 MCU.4 MCU.8 MCU.9 MCU.10 MCU.14 MCU.16 MCU.17 MCU.20 MCU.24 MCU.25 MCU.33 MCU.34 MCU.35 MCU.36 MCU.37 MCU.38 MCU.39 MCU.44 MCU.45 MCU.51 MCU.52 MCU.54 MCU.57 MCU.58 MCU.59 SD.1 SD.8 SW1.1 SW1.2 SW2.1 SW2.2 Vin.MP1 Vin.MP2
copper on no net: | length 0
  Top Layer w0.254: 79.764,96.725 79.787,96.702

## Polygon pours and split planes (outlines as drawn)
GND on Bottom Layer "GND_L02_P000" (solid, remove dead copper, pour order 0): 51.034,103.053 51.161,103.18 118.09,103.18 118.09,74.859 50.317,74.859

## Keep-outs
Keep-Out Layer:
  lines w0.254: 52.705,76.835 52.705,101.6 117.094,101.6 117.094,97.155 117.031,97.092 117.031,76.835 109.093,76.835 52.705,76.835